# EAGLE board clip_LMT84 (EAGLE 7.6.0)
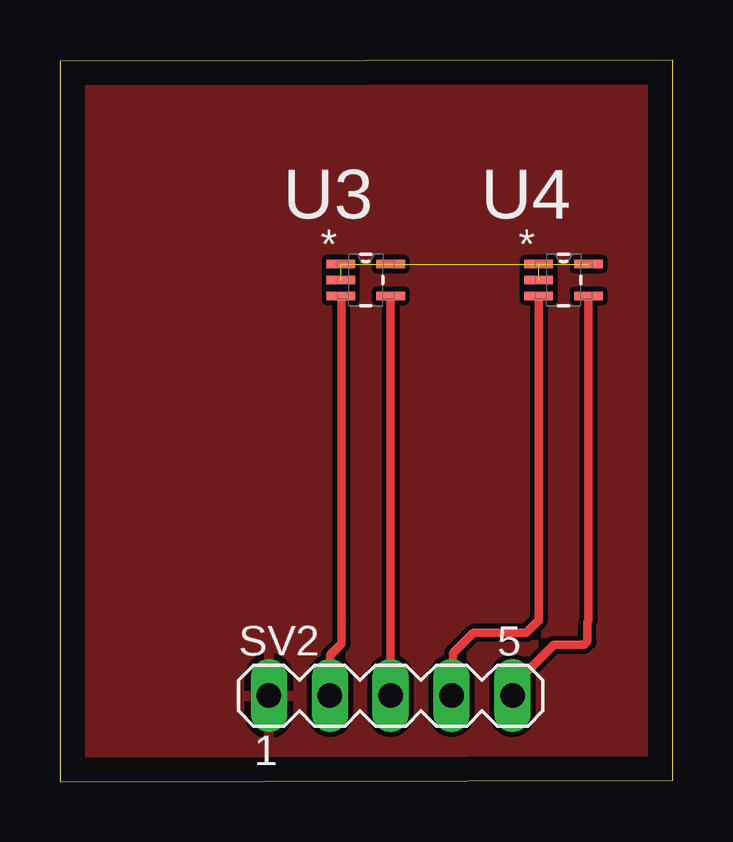
[diagram p0: board, top side]

Size 25.55 x 30.07 mm. Coordinates in mm from the lower left corner, seen from the top.
Outline: 0,0 25.55,0.05 25.55,30.07 0,30.02 0,0
Copper layers (1*16): Top 0.035mm / dielectric 1.5mm / Bottom 0.035mm
Design rules "default": minimum track width 10mil, minimum drill 24mil, track to track 8mil, track to pad 8mil, pad to pad 8mil, via to via 8mil, smd to smd 8mil, copper to edge 40mil, drill to drill 8mil, minimum pad ring 10mil, minimum via ring 8mil, stop-mask expansion 4mil, vias tented up to drill 0mil, thermal gap 10mil

## Footprints (pad centres in the part's own frame; a part is rotated, then mirrored left to right if it is on the bottom)
MA05-1 = drill 1.016 long: 1 -5.08,0; 2 -2.54,0; 3 0,0; 4 2.54,0; 5 5.08,0
SOT65P210X110-5N = smd 1.168 x 0.356: 1 -1.041,0.66; 2 -1.041,0; 3 -1.041,-0.66; 4 1.041,-0.66; 5 1.041,0.66

## Placement (x,y rotation side)
SV2  [MA05-1]  13.79,3.59 0 top
U3  TPS3801I50DCKR  [SOT65P210X110-5N]  12.75,20.9 0 top
U4  TPS3801I50DCKR  [SOT65P210X110-5N]  21,20.9 0 top

## Library data of the parts
SV2 = con-lstb; OC_FARNELL: unknown; OC_NEWARK: unknown
U3 U4 = Texas Instruments_By_element14_Batch_1; MPN: TPS3801I50DCKR; OC_FARNELL: 1652466; OC_NEWARK: 77C0385; PACKAGE: SC-70-5; SUPPLIER: Texas Instruments

## Nets
GND: SV2.1
N$1: SV2.3 U3.4
N$2: SV2.5 U4.4
N$3: SV2.4 U4.3
S$1: U3.1 U3.2 U3.5 U4.1 U4.2 U4.5
VOUT_AIR: SV2.2 U3.3

## Tracks (layer width: path | path; a pad name or v marks a point on that pad's centre or on a via)
GND
  pour Top: -1.57,31.47 -1.27,-1.27 27.05,-1.67 26.75,31.07
N$1
  Top 0.35: U3.4 SV2.3
N$2
  Top 0.35: U4.4 22.04,6.71 22.01,6.68 21.99,6.66 21.99,5.85 21.84,5.7 20.59,5.7 18.87,3.98 SV2.5
N$3
  Top 0.35: U4.3 19.96,6.72 19.44,6.2 17.24,6.2 16.39,5.35 16.39,3.65 SV2.4
S$1  (5 unrouted)
VOUT_AIR
  Top 0.35: SV2.2 11.25,5.26 11.74,5.75 11.74,6.74 11.73,6.75 11.73,20.22 U3.3